# Altium PCB HCMS-2975.PcbDoc
Units mm, origin at the board's own origin, x right, y up, seen from the top; angles counter-clockwise.
Board outline 86 x 35 mm, 2 copper layers (Top Layer, Bottom Layer); 5 components, 30 nets, 85 pads, 0 vias.
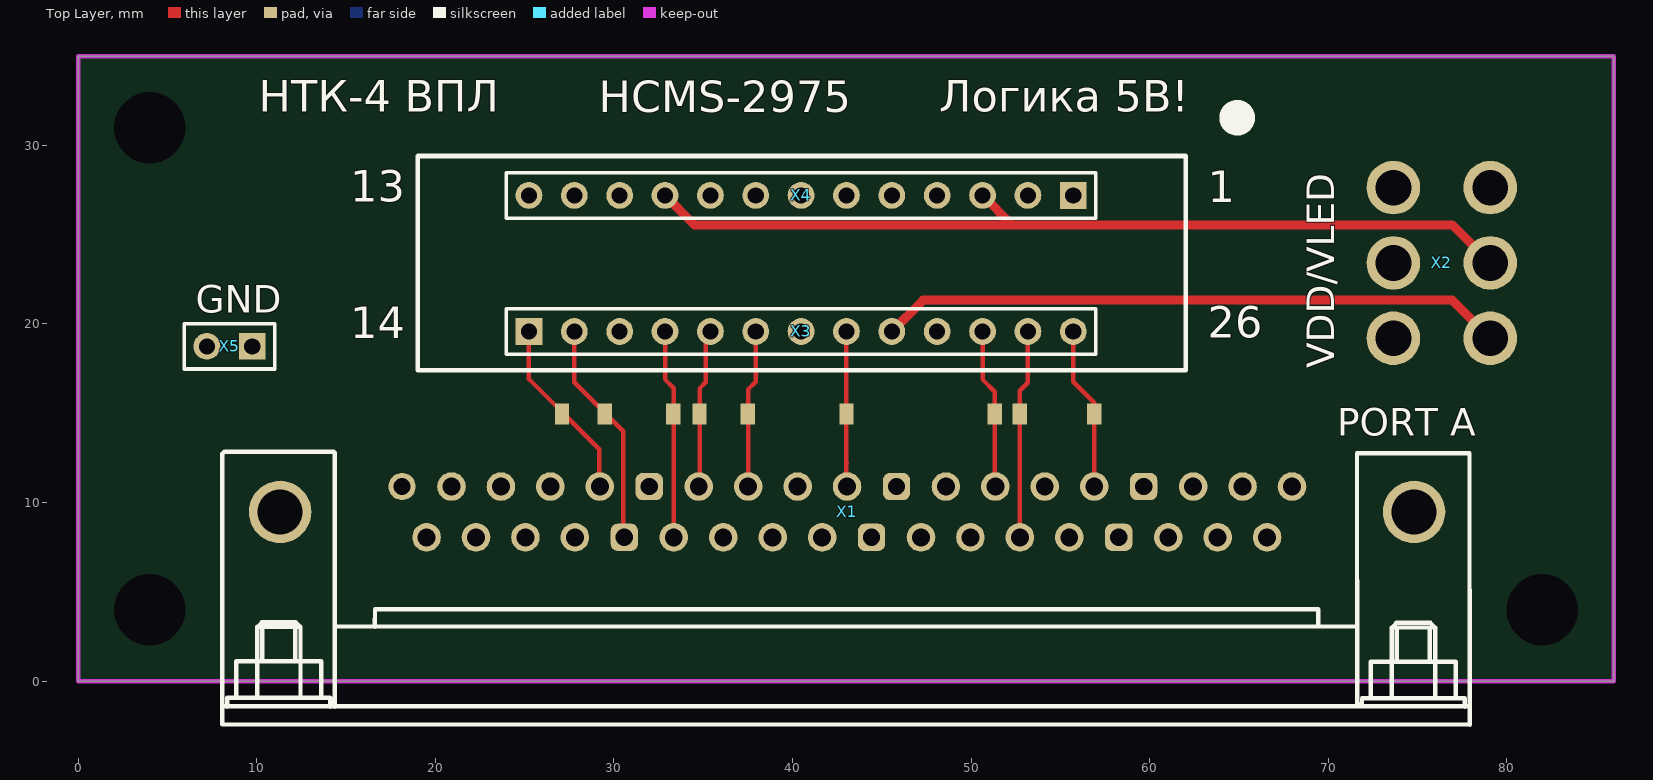
[diagram p0: Top Layer view]
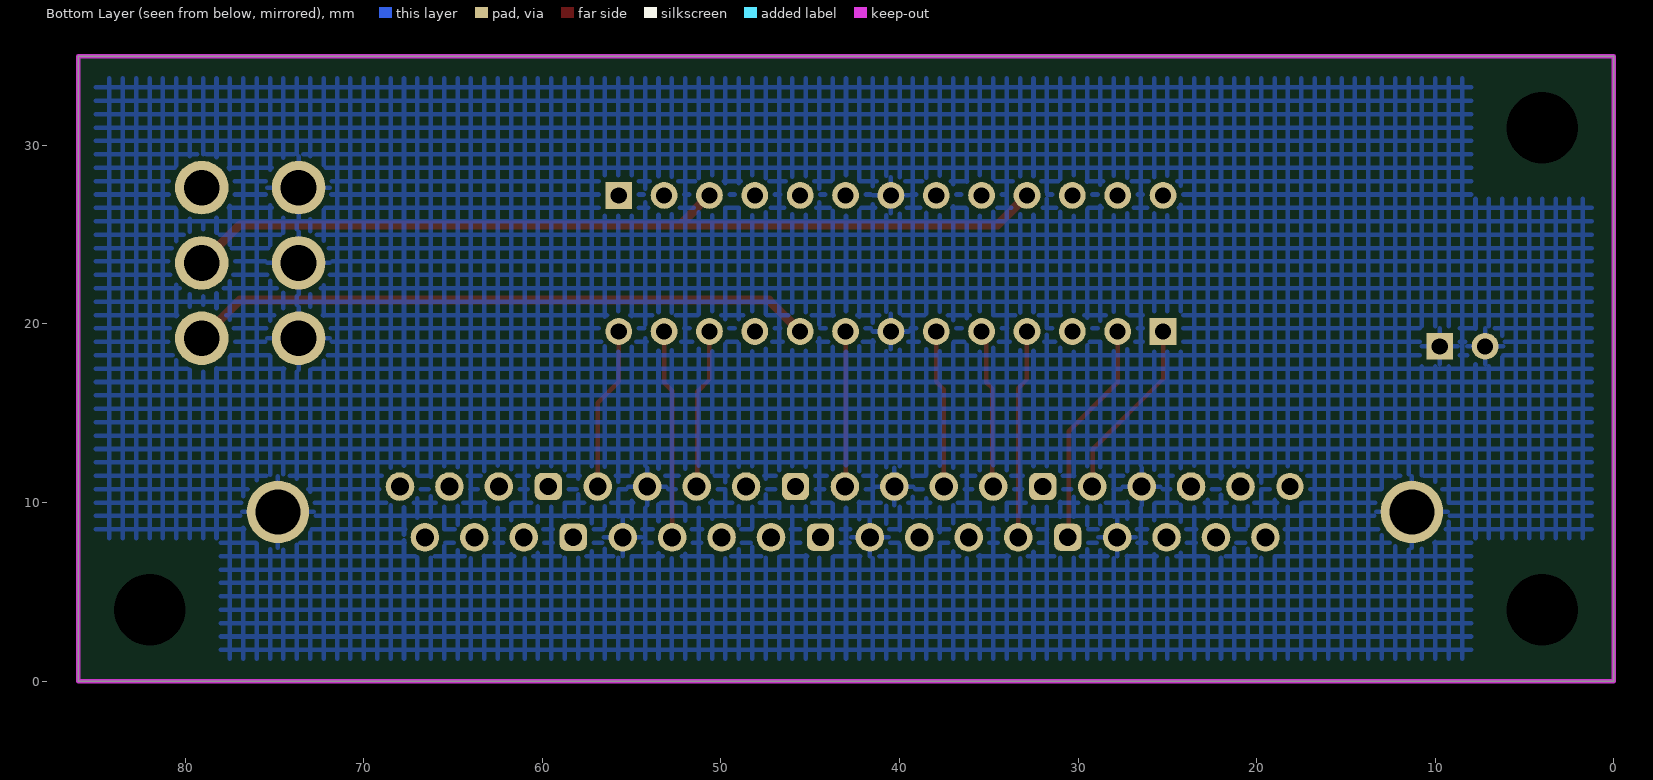
[diagram p1: Bottom Layer view, seen from below]

## Layer stack, top to bottom
Top Solder: solder mask 0.0102, Solder Resist, Dk 3.5
Top Layer: signal copper 0.0356
Dielectric 1: dielectric 0.32, FR-4, Dk 4.8
Bottom Layer: signal copper 0.0356
Bottom Solder: solder mask 0.0102, Solder Resist, Dk 3.5

## Board outline
0,0 86,0 86,35 0,35

## Design rules (kind name [scope] priority, off if disabled: settings)
Clearance [All] p1: gap=0.254
PolygonConnect [All] p1: connectstyle=Relief reliefconductorwidth=0.254 reliefentries=4 polygonreliefangle="90 Angle" airgapwidth=0.254
RoutingVias [All] p1: holewidth=0.711 width=1.27 viastyle="Through Hole" minholewidth=0.711 minwidth=1.27 maxholewidth=0.711 maxwidth=1.27
SolderMaskExpansion [All] p1: expansion=0.102
Width [All] p1: maxlimit=10 minlimit=0.254 preferedwidth=0.254
29 further rules are at their usual default settings.

## Components (designator, comment, footprint, x,y, rotation, side; value= is the part's Value field where it differs from the comment)
X1 "PORT A" CHEAP_CONN_FEMALE 74.809,9.474 r180 top
X2 "VDD/VLED" POWER 71.456,23.419 r270 top
X3 "14 - 26" HDR1X13 25.246,19.58 r0 top
X4 "1 - 13" HDR1X13 55.726,27.2 r180 top
X5 "GND" HDR1X2 9.75,18.75 r180 top (schematic designator X6)

## Footprints (in the part's own frame and the unit in brackets; to place one, negate y for a bottom-side part, rotate by r counter-clockwise, add the part's x,y. Pads: shape width x height; smd on the part's side, far side on the other; paste and mask are expansions set on the pad)
CHEAP_CONN_FEMALE [mm] "CHEAP_CONN_FEMALE"
  round 1.6 hole 1: 1(6.833,-1.422) 2(9.601,-1.422) 3(12.37,-1.422) 5(17.907,-1.422) 6(20.676,-1.422) 7(23.444,-1.422) 8(26.213,-1.422) 10(31.75,-1.422) 11(34.519,-1.422) 12(37.287,-1.422) 13(40.056,-1.422) 15(45.593,-1.422) 16(48.362,-1.422) 17(51.13,-1.422) 18(53.899,-1.422) 20(8.23,1.422) 21(10.998,1.422) 22(13.767,1.422) 24(19.304,1.422) 25(22.073,1.422) 26(24.841,1.422) 27(27.61,1.422) 29(33.147,1.422) 30(35.916,1.422) 31(38.684,1.422) 32(41.453,1.422) 34(46.99,1.422) 35(49.759,1.422) 36(52.527,1.422) 37(55.296,1.422)
  rrect50% 1.524x1.524 hole 0.965: 4(15.138,-1.422) 9(28.981,-1.422) 14(42.824,-1.422) 23(16.535,1.422) 28(30.378,1.422) 33(44.221,1.422)
  round 1.524 hole 0.965: 19(56.667,-1.422)
  round 3.5 hole 2.5: 38(0,0) 39(63.5,0)
  silkscreen extent -3.11,-3.36 66.72,11.92
HDR1X2 [mm] "Connector; Header; 2 Position"
  rect 1.5x1.5 hole 0.9: 1(0,0)
  round 1.5 hole 0.9: 2(2.54,0)
  silkscreen extent -1.27,-1.27 3.81,1.27
HDR1X13 [mm] "Connector; Header; 13 Position"
  rect 1.5x1.5 hole 0.9: 1(0,0)
  round 1.5 hole 0.9: 2(2.54,0) 3(5.08,0) 4(7.62,0) 5(10.16,0) 6(12.7,0) 7(15.24,0) 8(17.78,0) 9(20.32,0) 10(22.86,0) 11(25.4,0) 12(27.94,0) 13(30.48,0)
  silkscreen extent -1.27,-1.27 31.75,1.27
POWER [mm] "POWER"
  round 3 hole 2: 1(4.217,7.62) 2(0,7.62) 3(-4.217,7.62) 4(4.217,2.198) 5(0,2.198) 6(-4.217,2.198)

## Part data
X1: library part CHEAP_CON_37_FEMALE
X2: library part POWER
X3 X4: library part "Header 13", "Header, 13-Pin"
X5: library part "Header 2", "Header, 2-Pin"

## Free pads (board coordinates)
  round 3 hole 4 unplated: 0(4,4) 0(4,31) 0(82,4)
  rect 0.8x1.2 smd: 0(27.102,14.961) 1(29.489,14.961) 2(33.325,14.961) 3(34.798,14.961) 4(37.49,14.961) 5(43.028,14.961) 6(51.333,14.961) 7(52.73,14.961) 8(56.902,14.961)

## Nets (pads, with @x,y where several pads share a name; then routed paths per layer and width w, separated by ;. In a path a pad name is that pad's centre, name@x,y a point inside that pad or via, vN(x,y) a via of type N, cw(c..) or ccw(c..) an arc to the next point about the centre after c; other vN are vias at no path point)
BLANK: pad.4 X1.12 X3.6 | length 8.9
  Top Layer w0.254: X1.12 37.516,10.902 37.516,16.332 37.946,16.762 X3.6
C\E\: pad.3 X1.13 X3.5 | length 9
  Top Layer w0.254: X1.13 34.798,10.942 34.798,16.383 35.154,16.739 35.154,19.327 X3.5
CLK: pad.2 X1.32 X3.4 | length 11.7
  Top Layer w0.254: X3.4 32.866,16.893 33.35,16.408 33.35,8.057 X1.32
DATAIN: pad.0@27.102,14.961 X1.15 X3.1 | length 10.3
  Top Layer w0.254: X3.1 25.246,16.918 29.185,12.979 29.185,10.928 X1.15
DATAOUT: pad.8 X1.5 X3.13 | length 9.2
  Top Layer w0.254: X3.13 55.726,16.774 56.902,15.598 X1.5
GND: X1.6 X1.11 X1.16 X1.24 X1.29 X1.34 X1.38 X1.39 X2.4 X2.5 X2.6 X3.7 X4.7 X5.1 X5.2
OSC: pad.7 X1.25 X3.12 | length 11.7
  Top Layer w0.254: X1.25 52.73,8.057 52.73,16.256 53.186,16.712 X3.12
P0.2: X1.14
P0.5: X1.31
P0.7: X1.30
P1.1: X1.28
P1.2: X1.9
P1.3: X1.27
P1.4: X1.8
P1.5: X1.26
P2.1: X1.23
P2.2: X1.4
P2.3: X1.22
P2.4: X1.3
P2.5: X1.21
P2.6: X1.2
P2.7: X1.20
PFI1: X1.36
PFI2: X1.17
PFI3: X1.35
R\E\S\E\T\: pad.6 X1.7 X3.11 | length 9
  Top Layer w0.254: X3.11 50.646,16.893 51.333,16.205 51.333,10.928 X1.7
RS: pad.1 X1.33 X3.2 | length 12.7
  Top Layer w0.254: X3.2 27.786,16.74 30.531,13.995 30.531,8.108 X1.33
SEL: pad.5 X1.10 X3.8 | length 8.7
  Top Layer w0.254: X3.8 43.026,12.194 ; 43.028,12.192 43.026,12.194 ; X1.10 43.026,10.929 43.026,12.194
VDD: X2.1 X3.9 | length 35.1
  Top Layer w0.508: X3.9 47.322,21.336 76.941,21.336 X2.1
VLED: X2.2 X4.3 X4.10 | length 50.1
  Top Layer w0.508: X4.10 34.513,25.552 52.293,25.552 ; X4.3 52.293,25.552 ; X2.2 76.942,25.552 52.293,25.552
pads on no net: X1.1 X1.18 X1.19 X1.37 X2.3 X3.3 X3.10 X4.1 X4.2 X4.4 X4.5 X4.6 X4.8 X4.9 X4.11 X4.12 X4.13

## Polygon pours and split planes (outlines as drawn)
GND on Bottom Layer "Top Layer-No Net" (hatched 90Degree grid 0.75 track 0.254, remove dead copper, pour order 4): 1.25,33.75 85,33.75 85,1.25 1.25,1.25

## Keep-outs
Keep-Out Layer:
  the board outline again, w0.254

## Other copper
Bottom Layer:
  pour cut-out: 86,0 86,8 78,8 78,0
  pour cut-out: 8,27 8,35 0,35 0,27
  pour cut-out: 8,0 8,8 0,8 0,0

## Silkscreen, mask and mechanical layers (free items; w line width, h text height)
Top Overlay:
  circle w1: c64.903,31.547 r0.5
  lines w0.254: 19.019,17.407 19.019,29.407 62.019,29.407 62.019,17.407 19.019,17.407
  text "НТК-4 ВПЛ" at 10.115,31.283 h3
  text "HCMS-2975" at 29.165,31.267 h3
  text "Логика 5В!" at 48.215,31.284 h3
  text "13" at 15.25,26.252 h3
  text "1" at 63.253,26.235 h3
  text "26" at 63.25,18.632 h3
  text "14" at 15.25,18.615 h3